# Altium PCB A3.PcbDoc
Units mm, origin at the board's own origin, x right, y up, seen from the top; angles counter-clockwise.
Board outline 84 x 79 mm, 2 copper layers (Top Layer, Bottom Layer); 18 components, 44 nets, 114 pads, 0 vias.
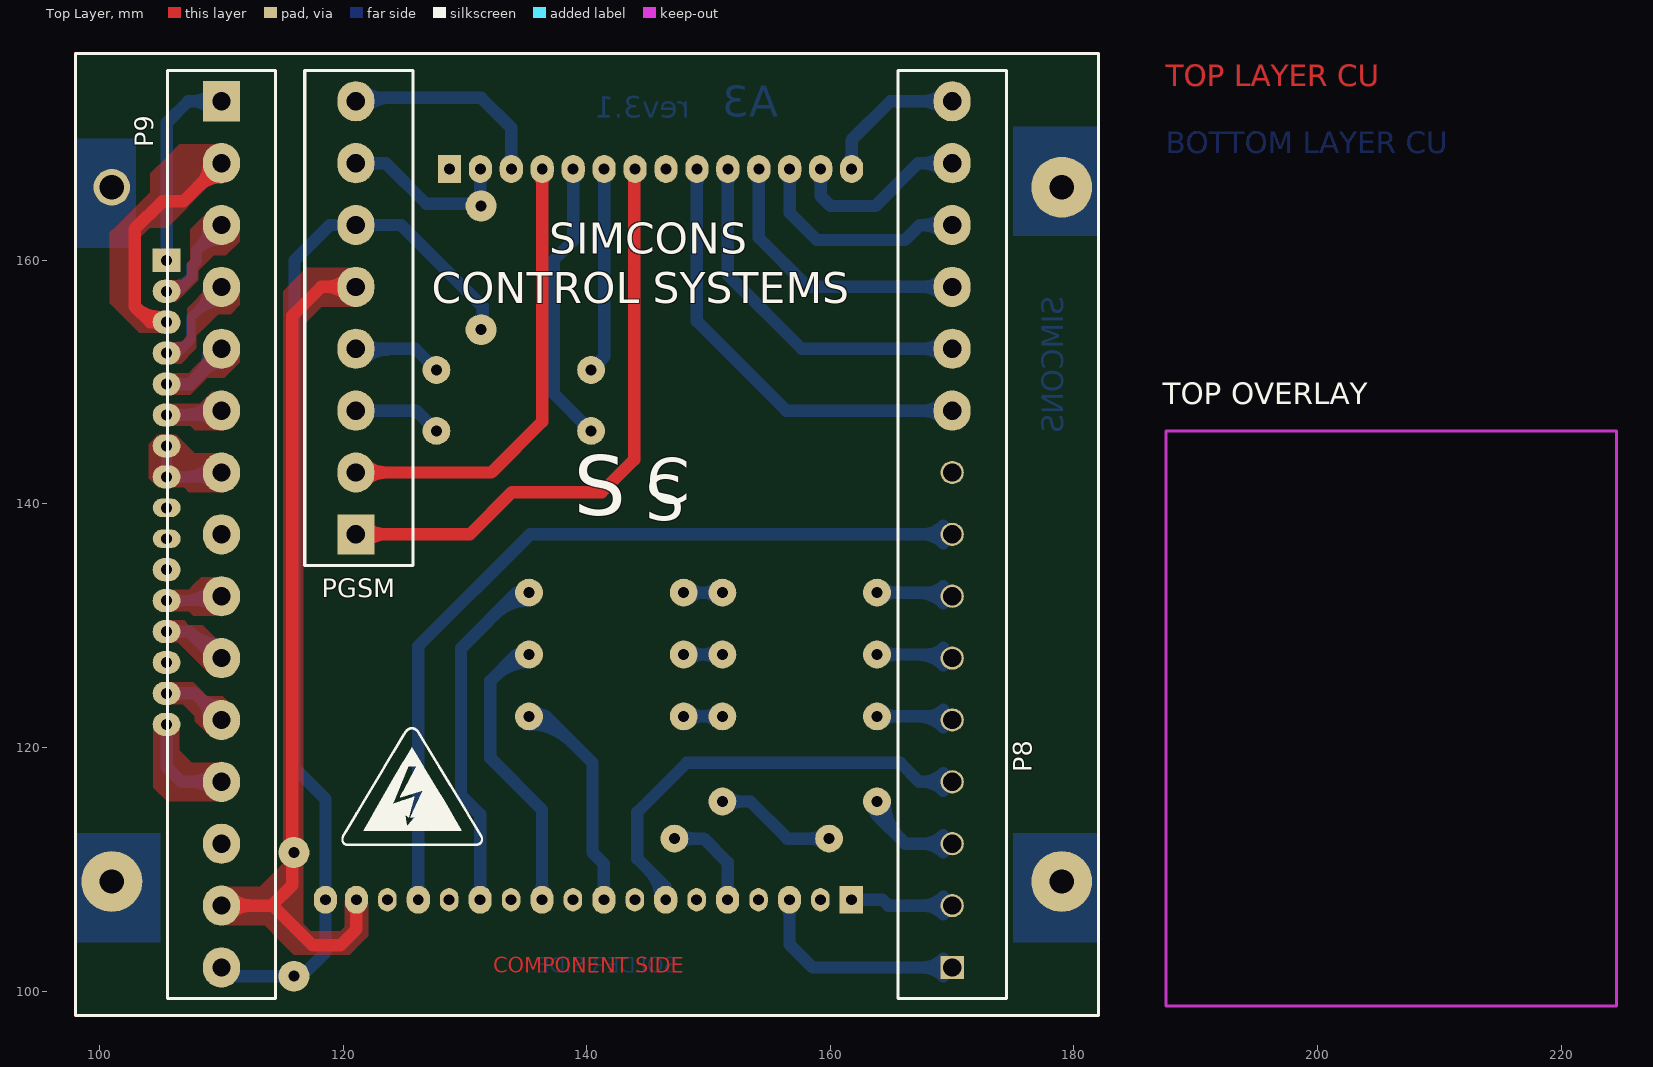
[diagram p0: Top Layer view]
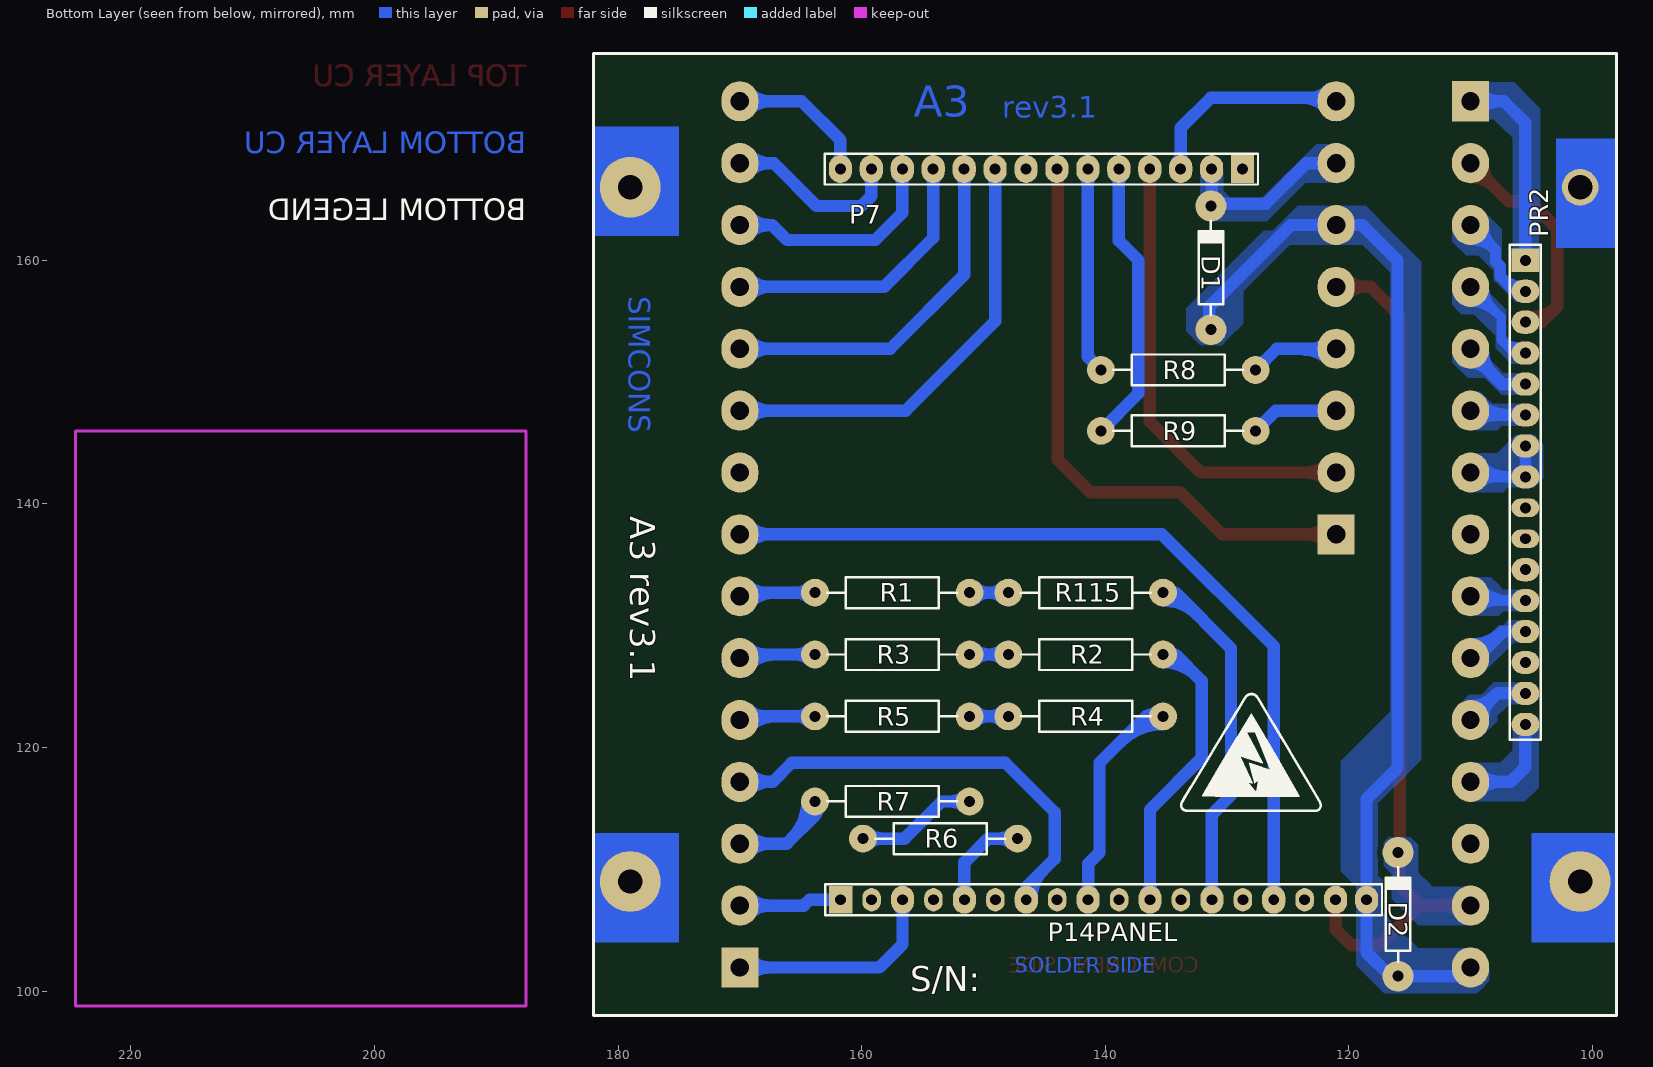
[diagram p1: Bottom Layer view, seen from below]
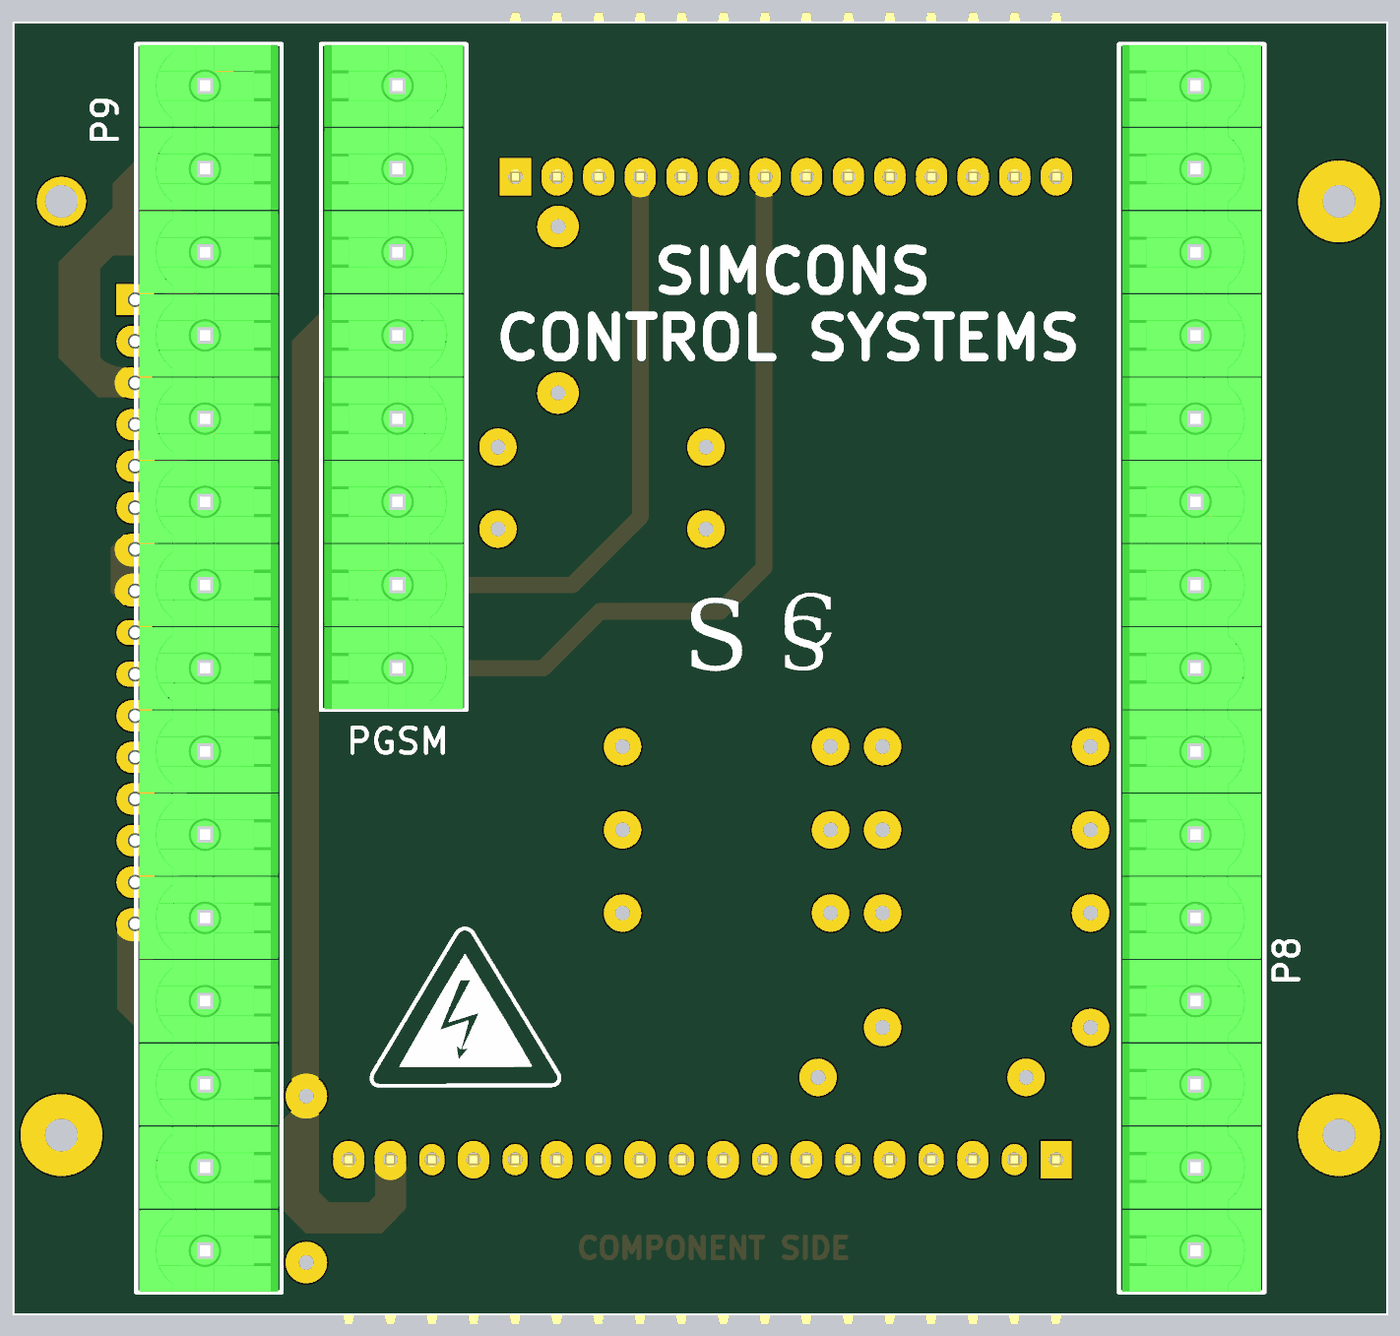
[diagram p2: 3D render of the assembled board from above, using the file's embedded part models]

## Layer stack, top to bottom
Top Solder: solder mask 0.0102, Solder Resist, Dk 3.5
Top Layer: signal copper 0.0356
Dielectric1: dielectric 0.32, FR-4, Dk 4.8
Bottom Layer: signal copper 0.0356
Bottom Solder: solder mask 0.0102, Solder Resist, Dk 3.5

## Board outline
98,98 182,98 182,177 98,177

## Design rules (kind name [scope] priority, off if disabled: settings)
Clearance AC [(InNet('R') OR InNet('Y') OR InNet('B') OR InNet('N') OR InNet('DGB') OR InNet('DGN') OR InNet('DGR') OR InNet('DGY'))] p1: gap=0.635 ignorepadtopadclearanceinfootprint=FALSE except(0: Arc-Hole Track-Hole SMDPad-Hole THPad-Hole Via-Hole Fill-Hole Poly-Hole Region-Hole Text-Hole)
Clearance [All] p2: gap=0.457 ignorepadtopadclearanceinfootprint=FALSE except(0: Arc-Hole Track-Hole SMDPad-Hole THPad-Hole Via-Hole Fill-Hole Poly-Hole Region-Hole Text-Hole)
ComponentClearance [All] p1 off: gap=0.254 collisioncheckmode=3 verticalgap=0.254 showdistances=FALSE
Height [All] p1 off: minheight=0 maxheight=25.4 prefheight=12.7
PolygonConnect [All] p1: connectstyle=Direct reliefconductorwidth=0.254 reliefentries=4 polygonreliefangle="90 Angle" airgapwidth=0.254
RoutingVias [All] p1: holewidth=0.711 width=1.524 viastyle="Through Hole" minholewidth=0.711 minwidth=1.27 maxholewidth=2 maxwidth=3.048
SilkToSolderMaskClearance SilkscreenOverComponentPads [IsPad] p1: minsilkscreentomaskgap=0.254 clearancetoexposedcopper=TRUE
SolderMaskExpansion [All] p1: expansion=0.102
Width [All] p1: maxlimit=1.27 minlimit=0.61 preferedwidth=0.762
27 further rules are at their usual default settings.

## Components (designator, comment, footprint, x,y, rotation, side; value= is the part's Value field where it differs from the comment)
D1 "P6KE6V8A" DIODE1A 131.318,159.385 r90 bottom
D2 "P6KE44CA" DIODE1A 115.951,106.299 r90 bottom
P7 "Header 14" HDR1X14_BURGE_M 128.72,167.5 r0 bottom locked
P8 "XY2500 7PIN+8PIN MALE ST, FEMALE R/A" XY2500_15PIN_M_ST#1 170,137.5 r90 top locked
P9 "XY2500 7PIN+8PIN MALE ST, FEMALE R/A" XY2500_15PIN_M_ST#2 110,137.5 r270 top locked
P14PANEL "Header 18" HDR1X18_BURGE_M 161.72,107.5 r180 bottom locked
PGSM "XY2500 8PIN MALE ST, FEMALE R/A" XY2500_8PIN_M_ST 121.285,155.28 r90 top locked
PR2 "Header 16" HDR1X16_BURGE_F 105.5,160 r270 bottom
R1 "MFR 1M .5W" AXIAL-0.5 157.48,132.715 r0 bottom
R2 "MFR 1M .5W" AXIAL-0.5 141.605,127.635 r0 bottom
R3 "MFR 1M .5W" AXIAL-0.5 157.48,127.635 r0 bottom
R4 "MFR 1M .5W" AXIAL-0.5 141.605,122.555 r0 bottom
R5 "MFR 1M .5W" AXIAL-0.5 157.48,122.555 r0 bottom
R6 "MFR 1M .5W" AXIAL-0.5 153.543,112.522 r0 bottom
R7 "MFR 1M .5W" AXIAL-0.5 157.48,115.57 r0 bottom
R8 "MFR 1M .5W" AXIAL-0.5 134,151 r180 bottom
R9 "MFR 1M .5W" AXIAL-0.5 134,146 r180 bottom
R115 "MFR 1M .5W" AXIAL-0.5 141.605,132.715 r0 bottom

## Footprints (in the part's own frame and the unit in brackets; to place one, negate y for a bottom-side part, rotate by r counter-clockwise, add the part's x,y. Pads: shape width x height; smd on the part's side, far side on the other; paste and mask are expansions set on the pad)
AXIAL-0.5 [mil] "Axial Device, Thru-Hole; 2 Leads; 0.5 in Pin Spacing"
  round 90 hole 35.43: 1(-250,0) 2(250,0)
  silkscreen extent -210,-50 210,50, body extent -270,-51 270,51, height 106
DIODE1A [mm] "DIODE 1 AMPERE"
  round 2.54 hole 0.9: 1(-5.08,0) 2(5.08,0)
  silkscreen extent -3.87,-1.02 3.87,1.02, body extent -5.48,-1 5.48,1, height 2.09
HDR1X14_BURGE_M [mm] "Connector; Header; 14 Position"
  rect 1.905x2.286 hole 0.9: 1(0,0)
  oval 1.905x2.286 hole 0.9: 2(2.54,0) 3(5.08,0) 4(7.62,0) 5(10.16,0) 6(12.7,0) 7(15.24,0) 8(17.78,0) 9(20.32,0) 10(22.86,0) 11(25.4,0) 12(27.94,0) 13(30.48,0) 14(33.02,0)
  silkscreen extent -1.27,-1.27 34.29,1.27, body extent -1.27,-10.04 34.29,0.32, height 2.56
HDR1X16_BURGE_F [mil] "Connector; Header; 16 Position"
  rect 75x90 hole 35.43: 1(0,0)
  oval 75x90 hole 35.43: 2(100,0) 3(200,0) 4(300,0) 5(400,0) 6(500,0) 7(600,0) 8(700,0) 11(1000,0) 12(1100,0) 13(1200,0) 14(1300,0) 15(1400,0) 16(1500,0)
  oval 60x90 hole 35.43: 9(800,0) 10(900,0)
  silkscreen extent -50,-50 1550,50, body extent -50,-50 1550,50, height 237
HDR1X18_BURGE_M [mm] "Connector; Header; 18 Position"
  rect 1.905x2.286 hole 0.9: 1(0,0)
  oval 1.524x1.905 hole 0.9: 2(2.54,0) 4(7.62,0) 6(12.7,0) 8(17.78,0) 10(22.86,0) 12(27.94,0) 14(33.02,0) 16(38.1,0)
  oval 1.905x2.286 hole 0.9: 3(5.08,0) 5(10.16,0) 7(15.24,0) 9(20.32,0) 11(25.4,0) 13(30.48,0) 15(35.56,0) 17(40.64,0) 18(43.18,0)
  silkscreen extent -1.27,-1.27 44.45,1.27, body extent -1.27,-10.04 44.45,0.32, height 2.54
XY2500_8PIN_M_ST [mm]
  rect 3.302x3.048 hole 1.5: 1(-17.78,0.25)
  oval 3.302x3.048 hole 1.5: 2(-12.7,0.25) 3(-7.62,0.25) 4(-2.54,0.25) 5(2.54,0.25) 6(7.62,0.25) 7(12.7,0.25) 8(17.78,0.25)
  silkscreen extent -20.32,-4.45 20.32,4.45, body extent -20.28,-4.24 20.28,4.24, height 12
XY2500_15PIN_M_ST#1 [mm]
  rect 1.905x1.905 / inner rect 3.302x3.048 / far side rect 3.302x3.048 hole 1.5: 1(-35.56,0)
  round 1.905 / inner oval 3.302x3.048 / far side oval 3.302x3.048 hole 1.5: 2(-30.48,0) 3(-25.4,0) 4(-20.32,0) 5(-15.24,0) 6(-10.16,0) 7(-5.08,0) 8(0,0) 9(5.08,0)
  oval 3.302x3.048 hole 1.5: 10(10.16,0) 11(15.24,0) 12(20.32,0) 13(25.4,0) 14(30.48,0) 15(35.56,0)
  silkscreen extent -38.1,-4.45 38.1,4.45, body extent -38.06,-4.24 38.06,4.24, height 12.08
XY2500_15PIN_M_ST#2 [mm]
  rect 3.302x3.048 hole 1.5: 1(-35.56,0)
  oval 3.302x3.048 hole 1.5: 2(-30.48,0) 3(-25.4,0) 4(-20.32,0) 5(-15.24,0) 6(-10.16,0) 7(-5.08,0) 8(0,0) 9(5.08,0) 10(10.16,0) 11(15.24,0) 12(20.32,0) 13(25.4,0) 14(30.48,0) 15(35.56,0)
  silkscreen extent -38.1,-4.45 38.1,4.45, body extent -38.06,-4.24 38.06,4.24, height 12.08

## Part data
D1 D2: library part "Diode 1N5408", "3 Amp Medium Power Silicon Rectifier Diode"
P7: "Header, 14-Pin"
P8 P9: library part "Header 15", "Header, 15-Pin"
P14PANEL: "Header, 18-Pin"
PGSM: library part "Header 8", "Header, 8-Pin"
PR2: "Header, 16-Pin"
R1 R2 R3 R4 R5 R6 R7 R8 R9 R115: library part "Res Semi", "Semiconductor Resistor"

## Free pads (board coordinates)
  round 5 hole 2: 0(101,109) 1(179,109) 2(179,166)
  round 3 hole 2: 3(101,166)

## Nets (pads, with @x,y where several pads share a name; then routed paths per layer and width w, separated by ;. In a path a pad name is that pad's centre, name@x,y a point inside that pad or via, vN(x,y) a via of type N, cw(c..) or ccw(c..) an arc to the next point about the centre after c; other vN are vias at no path point)
B: P8.5 R5.2 | length 12.6
  Bottom Layer w1.016: R5.2 169.705,122.555 P8.5 ; R5.2@164.279,122.106 cw(c165.363,121.022) 165.363,122.555 cw(c165.363,124.088) R5.2@164.279,123.004 ; 167.142,122.555 cw(c167.142,119.529) P8.5@169.282,121.669 ; 167.953,122.555 ccw(c167.953,124.434) P8.5@169.282,123.105
B_M: P14PANEL.9 R4.1 | length 28
  Bottom Layer w1.016: R4.1@135.255,121.92 cw(c135.255,117.014) 138.724,120.483 ; R4.1 136.652,122.555 ; R4.1@135.255,122.936 cw(c135.255,120.483) 136.989,122.218 ; R4.1@135.733,122.137 cw(c136.652,121.336) 136.652,122.555 ; R4.1@135.733,122.973 ccw(c136.652,123.774) 136.652,122.555 ; P14PANEL.9@141.086,108.005 ccw(c140.327,108.764) 141.4,108.764 ccw(c142.473,108.764) P14PANEL.9@141.714,108.005 ; P14PANEL.9 141.4,110.441 140.462,111.379 140.462,118.745 136.652,122.555
BAT+: D2.2 P9.14 P14PANEL.17 PGSM.5 | length 80.1
  Top Layer w1.016: P9.14 114.132,107.02 ; P9.14@110.722,106.305 cw(c112.436,104.608) 112.436,107.02 cw(c112.436,109.432) P9.14@110.722,107.735 ; PGSM.5@120.317,157.102 ccw(c118.582,155.367) 118.582,157.82 ccw(c118.582,160.273) PGSM.5@120.317,158.538 ; P14PANEL.17@120.766,106.995 cw(c120.007,106.236) 121.08,106.236 cw(c122.153,106.236) P14PANEL.17@121.394,106.995 ; PGSM.5 118.196,157.82 115.824,155.448 115.824,108.712 114.132,107.02 ; P14PANEL.17 121.08,105.078 119.761,103.759 117.475,103.759 114.214,107.02 114.132,107.02
BTS+: PGSM.3 R9.2 | length 7.6
  Bottom Layer w1.016: PGSM.3@121.248,147.447 PGSM.3 125.99,147.66 R9.2
BTS+_R: P7.5 R9.1 | length 25.1
  Bottom Layer w1.016: P7.5@138.566,166.995 cw(c137.807,166.236) 138.88,166.236 cw(c139.953,166.236) P7.5@139.194,166.995 ; P7.5 138.88,161.613 137.287,160.02 137.287,149.063 R9.1
BTS-: PGSM.4 R8.2 | length 11.3
  Bottom Layer w1.016: PGSM.4@121.121,152.654 PGSM.4 125.91,152.74 R8.2 ; PGSM.4@121.753,151.895 cw(c123.587,150.061) 123.587,152.654 ; PGSM.4@121.753,153.331 ccw(c123.389,154.967) 123.389,152.654
BTS-_R: P7.6 R8.1 | length 18.6
  Bottom Layer w1.016: R8.1 141.42,152.07 P7.6 ; P7.6@141.106,166.995 cw(c140.347,166.236) 141.42,166.236 cw(c142.493,166.236) P7.6@141.734,166.995
BUZZEROUT: P9.6 PR2.6 | length 10.2
  Bottom Layer w1.016: PR2.6 109.64,147.3 P9.6 ; PR2.6@106.005,146.986 cw(c106.764,146.227) 106.764,147.3 cw(c106.764,148.373) PR2.6@106.005,147.614 ; 106.985,147.3 ccw(c106.985,150.548) P9.6@109.282,148.251 ; 108.11,147.3 cw(c108.11,145.643) P9.6@109.282,146.815
CONT_S_IN: P7.7 PGSM.1 | length 53.1
  Top Layer w1.016: PGSM.1 130.388,137.5 133.858,140.97 141.224,140.97 143.891,143.637 143.891,167.431 P7.7 ; PGSM.1@121.753,136.782 cw(c123.488,135.047) 123.488,137.5 cw(c123.488,139.953) PGSM.1@121.753,138.218
CRANKOUT: P9.2 PR2.3 | length 27.1
  Top Layer w1.016: PR2.3@104.995,154.606 ccw(c104.236,153.847) 104.236,154.92 ccw(c104.236,155.993) PR2.3@104.995,155.234 ; PR2.3@105.263,155.362 cw(c104.956,158.296) 102.87,156.21 ; PR2.3 104.16,154.92 102.87,156.21 ; 108.049,166.029 cw(c110,164.078) P9.2@110,166.837 ; 108.355,166.335 ccw(c106.838,167.853) P9.2@108.984,167.853 ; P9.2 106.866,164.846 105.156,164.846 102.87,162.56 102.87,156.21
DGB: P8.1 P14PANEL.3 | length 23.3
  Bottom Layer w1.016: P14PANEL.3@156.326,106.995 cw(c155.567,106.236) 156.64,106.236 cw(c157.713,106.236) P14PANEL.3@156.954,106.995 ; P14PANEL.3 156.64,103.837 158.537,101.94 P8.1 ; P8.1@169.282,101.222 ccw(c167.547,99.487) 167.547,101.94 ccw(c167.547,104.393) P8.1@169.282,102.658
DGN: P8.4 P14PANEL.7 | length 42.6
  Bottom Layer w1.016: 145.123,109.893 cw(c142.921,107.691) P14PANEL.7@146.035,107.691 ; P14PANEL.7 146.48,108.536 144.145,110.871 144.145,114.681 148.209,118.745 165.735,118.745 167.3,117.18 P8.4 ; P8.4@169.282,116.462 ccw(c167.547,114.727) 167.547,117.18 ccw(c167.547,119.633) P8.4@169.282,117.898
DGR: P8.3 R7.2 | length 16.9
  Bottom Layer w1.016: R7.2@163.449,115.57 ccw(c165.289,115.57) 163.988,114.269 ; R7.2 163.83,114.427 166.157,112.1 P8.3 ; R7.2@164.465,115.57 ccw(c168.757,115.57) 165.722,112.535 ; P8.3@169.282,111.382 ccw(c167.547,109.647) 167.547,112.1 ccw(c167.547,114.553) P8.3@169.282,112.818
DGR_M: P14PANEL.5 R6.1 | length 12.3
  Bottom Layer w1.016: R6.1 149.606,112.522 151.56,110.568 P14PANEL.5 ; R6.1@147.642,112.073 cw(c148.726,110.989) 148.726,112.522 cw(c148.726,114.055) R6.1@147.642,112.971 ; P14PANEL.5@151.246,108.005 ccw(c150.487,108.764) 151.56,108.764 ccw(c152.633,108.764) P14PANEL.5@151.874,108.005
DGSTOPOUT: P9.3 PR2.2 | length 13.1
  Bottom Layer w0.914: PR2.2 105.774,157.734 106.623,157.734 107.557,158.669 107.557,159.517 107.95,159.91 107.95,160.85 P9.3 ; PR2.2@106.182,157.396 cw(c107.022,157.286) 107.022,158.133 ; 107.962,160.862 cw(c110,158.824) P9.3@110,161.706 ; 108.269,161.169 ccw(c106.664,162.773) P9.3@108.933,162.773
DGY: P8.2 P14PANEL.1 | length 14
  Bottom Layer w1.016: P14PANEL.1 164.28,107.5 164.76,107.02 P8.2 ; P14PANEL.1@162.034,107.186 cw(c162.793,106.427) 162.793,107.5 cw(c162.793,108.573) P14PANEL.1@162.034,107.814 ; P8.2@169.282,106.302 ccw(c167.547,104.567) 167.547,107.02 ccw(c167.547,109.473) P8.2@169.282,107.738
DIGITALIN: P9.7 PR2.7 PR2.8 | length 16.9
  Bottom Layer w0.914: PR2.8@105.15,142.57 ccw(c104.304,143.416) 105.5,143.416 ccw(c106.696,143.416) PR2.8@105.85,142.57 ; PR2.7@105.15,144.41 cw(c104.304,143.564) 105.5,143.564 cw(c106.696,143.564) PR2.7@105.85,144.41 ; PR2.7 PR2.8 109.64,142.22 P9.7 ; PR2.8@106.041,141.87 cw(c106.886,141.024) 106.886,142.22 cw(c106.886,143.416) PR2.8@106.041,142.57 ; 106.862,142.22 ccw(c106.862,145.591) P9.7@109.246,143.207 ; 107.987,142.22 cw(c107.987,140.44) P9.7@109.246,141.699
EMSTP: P7.11 P8.12 | length 28.7
  Bottom Layer w1.016: P7.11@153.806,166.995 cw(c153.047,166.236) 154.12,166.236 cw(c155.193,166.236) P7.11@154.434,166.995 ; P7.11 154.12,161.856 158.156,157.82 P8.12 ; P8.12@169.282,157.102 ccw(c167.547,155.367) 167.547,157.82 ccw(c167.547,160.273) P8.12@169.282,158.538
FLGIN: P7.4 PGSM.2 | length 43.3
  Top Layer w1.016: PGSM.2 132.166,142.58 136.34,146.754 P7.4 ; PGSM.2@121.753,141.862 cw(c123.488,140.127) 123.488,142.58 cw(c123.488,145.033) PGSM.2@121.753,143.298 ; P7.4@136.026,166.995 cw(c135.267,166.236) 136.34,166.236 cw(c137.413,166.236) P7.4@136.654,166.995
FLIN: P7.8 | length 0.3
  Bottom Layer w1.016: P7.8@146.304,167.304 P7.8
FLSTARTOUT: P9.4 PR2.4 | length 14
  Bottom Layer w0.762: PR2.4 106.406,152.38 107.481,153.455 ; PR2.4@105.8,152.941 ccw(c106.157,154.779) 107.481,153.455 ; 107.832,155.652 cw(c110,153.484) P9.4@110,156.55 ; 108.139,155.959 ccw(c106.404,157.693) P9.4@108.857,157.693 ; P9.4 107.481,155.301 107.481,153.455
GCONTACTIN: P9.10 PR2.13 | length 10
  Bottom Layer w1.016: PR2.13 107.335,129.52 ; PR2.13@106.005,129.206 cw(c106.764,128.447) 106.764,129.52 cw(c106.764,130.593) PR2.13@106.005,129.834 ; P9.10@109.965,128.482 cw(c109.845,132.029) 107.335,129.52 ; P9.10 109.515,127.34 107.335,129.52
GCONTACTOUT: P9.9 PR2.12 | length 10.6
  Bottom Layer w0.914: PR2.12 109.64,132.06 P9.9 ; PR2.12@106.041,131.71 cw(c106.886,130.864) 106.886,132.06 cw(c106.886,133.256) PR2.12@106.041,132.41 ; 106.862,132.06 ccw(c106.862,135.431) P9.9@109.246,133.047 ; 107.987,132.06 cw(c107.987,130.28) P9.9@109.246,131.539
GND: D1.1 D2.1 P9.15 P14PANEL.18 PGSM.6 | length 88.8
  Bottom Layer w1.016: P9.15 110.721,101.219 D2.1 116.586,101.219 118.54,103.173 118.54,115.775 116,118.315 116,160 118.9,162.9 PGSM.6 124.755,162.9 131.445,156.21 D1.1@131.445,154.305
LLOP: P7.12 P8.13 | length 23.9
  Bottom Layer w1.016: P7.12@156.346,166.995 cw(c155.587,166.236) 156.66,166.236 cw(c157.733,166.236) P7.12@156.974,166.995 ; P7.12 156.66,163.888 158.877,161.671 166.116,161.671 167.345,162.9 P8.13 ; P8.13@169.282,162.182 ccw(c167.547,160.447) 167.547,162.9 ccw(c167.547,165.353) P8.13@169.282,163.618
LOPIN: P7.9 P8.10 | length 42
  Bottom Layer w1.016: P7.9@148.726,166.995 cw(c147.967,166.236) 149.04,166.236 cw(c150.113,166.236) P7.9@149.354,166.995 ; P7.9 149.04,154.998 156.378,147.66 P8.10 ; P8.10@169.282,146.942 ccw(c167.547,145.207) 167.547,147.66 ccw(c167.547,150.113) P8.10@169.282,148.378
MANUALOUT: P9.1 PR2.1 | length 22.1
  Bottom Layer w1.016: PR2.1@105.186,160.314 ccw(c104.427,161.073) 105.5,161.073 ccw(c106.573,161.073) PR2.1@105.814,160.314 ; PR2.1 105.5,171.286 107.274,173.06 P9.1 ; P9.1@109.282,172.342 ccw(c107.547,170.607) 107.547,173.06 ccw(c107.547,175.513) P9.1@109.282,173.778
MCONTACTIN: P9.12 PR2.16 | length 14
  Bottom Layer w1.016: PR2.16@105.186,121.586 cw(c104.427,120.827) 105.5,120.827 cw(c106.573,120.827) PR2.16@105.814,121.586 ; PR2.16 105.5,118.401 106.721,117.18 P9.12 ; P9.12@109.282,116.462 ccw(c107.547,114.727) 107.547,117.18 ccw(c107.547,119.633) P9.12@109.282,117.898
MCONTACTOUT: P9.11 PR2.15 | length 10.9
  Bottom Layer w1.016: PR2.15 107.82,124.44 P9.11 ; PR2.15@106.005,124.126 cw(c106.764,123.367) 106.764,124.44 cw(c106.764,125.513) PR2.15@106.005,124.754 ; 108.049,124.211 ccw(c110,126.162) P9.11@110,123.403 ; 108.355,123.905 cw(c106.838,122.387) P9.11@108.984,122.387
N: P8.8 P14PANEL.15 | length 74
  Bottom Layer w1.016: P14PANEL.15@125.846,108.005 ccw(c125.087,108.764) 126.16,108.764 ccw(c127.233,108.764) P14PANEL.15@126.474,108.005 ; P14PANEL.15 126.16,128.319 135.341,137.5 P8.8 ; P8.8@169.282,136.782 ccw(c167.547,135.047) 167.547,137.5 ccw(c167.547,139.953) P8.8@169.282,138.218
NetR1_1: R1.1 R115.2 | length 8
  Bottom Layer w1.016: R115.2 R1.1 ; R115.2@148.404,132.266 cw(c149.488,131.182) 149.488,132.715 cw(c149.488,134.248) R115.2@148.404,133.164 ; R1.1@150.681,132.266 ccw(c149.597,131.182) 149.597,132.715 ccw(c149.597,134.248) R1.1@150.681,133.164
NetR2_2: R2.2 R3.1 | length 8
  Bottom Layer w1.016: R2.2 R3.1 ; R2.2@148.404,127.186 cw(c149.488,126.102) 149.488,127.635 cw(c149.488,129.168) R2.2@148.404,128.084 ; R3.1@150.681,127.186 ccw(c149.597,126.102) 149.597,127.635 ccw(c149.597,129.168) R3.1@150.681,128.084
NetR4_2: R4.2 R5.1 | length 8
  Bottom Layer w1.016: R4.2 R5.1 ; R4.2@148.404,122.106 cw(c149.488,121.022) 149.488,122.555 cw(c149.488,124.088) R4.2@148.404,123.004 ; R5.1@150.681,122.106 ccw(c149.597,121.022) 149.597,122.555 ccw(c149.597,124.088) R5.1@150.681,123.004
NetR6_2: R6.2 R7.1 | length 14.8
  Bottom Layer w1.016: R7.1 153.416,115.57 156.464,112.522 R6.2 ; R7.1@151.579,115.121 cw(c152.663,114.037) 152.663,115.57 cw(c152.663,117.103) R7.1@151.579,116.019 ; R6.2@159.444,112.073 ccw(c158.36,110.989) 158.36,112.522 ccw(c158.36,114.055) R6.2@159.444,112.971
OILTEMP: P7.14 P8.15 | length 17.5
  Bottom Layer w1.016: P7.14@161.426,168.005 ccw(c160.667,168.764) 161.74,168.764 ccw(c162.813,168.764) P7.14@162.054,168.005 ; P7.14 161.74,169.868 164.932,173.06 P8.15 ; P8.15@169.282,172.342 ccw(c167.547,170.607) 167.547,173.06 ccw(c167.547,175.513) P8.15@169.282,173.778
PREHEATEROUT: P9.5 PR2.5 | length 11.4
  Bottom Layer w1.016: PR2.5 107.422,149.84 110,152.418 P9.5 ; PR2.5@106.005,149.526 cw(c106.764,148.767) 106.764,149.84 cw(c106.764,150.913) PR2.5@106.005,150.154 ; 108.128,150.546 ccw(c106.06,152.613) P9.5@108.984,152.613 ; 108.598,151.016 cw(c110,149.615) P9.5@110,151.597
R: P8.7 R1.2 | length 12.6
  Bottom Layer w1.016: R1.2 169.705,132.715 P8.7 ; R1.2@164.279,132.266 cw(c165.363,131.182) 165.363,132.715 cw(c165.363,134.248) R1.2@164.279,133.164 ; 167.142,132.715 cw(c167.142,129.689) P8.7@169.282,131.829 ; 167.953,132.715 ccw(c167.953,134.594) P8.7@169.282,133.265
R1IN: P7.3 PGSM.8 | length 22.8
  Bottom Layer w1.016: PGSM.8 121.33,173.355 131.318,173.355 133.8,170.873 P7.3 ; PGSM.8@121.753,172.469 cw(c123.893,170.329) 123.893,173.355 ; PGSM.8@121.753,173.905 ccw(c123.082,175.234) 123.082,173.355 ; P7.3@133.486,168.005 ccw(c132.727,168.764) 133.8,168.764 ccw(c134.873,168.764) P7.3@134.114,168.005
R_M: P14PANEL.13 R115.1 | length 33.6
  Bottom Layer w1.016: P14PANEL.13@130.926,108.005 ccw(c130.167,108.764) 131.24,108.764 ccw(c132.313,108.764) P14PANEL.13@131.554,108.005 ; P14PANEL.13 131.24,114.505 129.667,116.078 129.667,128.143 134.239,132.715 R115.1 ; 132.437,130.913 cw(c135.255,128.094) R115.1@135.255,132.08
TIOUT: D1.2 P7.2 PGSM.7 | length 14.9
  Bottom Layer w1.016: PGSM.7 123.485,167.98 126.815,164.65 131.133,164.65 D1.2 ; P7.2 131.26,164.65 D1.2@131.445,164.465
WATERTEMP: P7.13 P8.14 | length 20.3
  Bottom Layer w1.016: P7.13@158.886,166.995 cw(c158.127,166.236) 159.2,166.236 cw(c160.273,166.236) P7.13@159.514,166.995 ; P7.13 159.2,165.285 160.02,164.465 163.703,164.465 167.218,167.98 P8.14 ; P8.14@169.282,167.262 ccw(c167.547,165.527) 167.547,167.98 ccw(c167.547,170.433) P8.14@169.282,168.698
WTANIN: P7.10 P8.11 | length 35.2
  Bottom Layer w1.016: P7.10@151.266,166.995 cw(c150.507,166.236) 151.58,166.236 cw(c152.653,166.236) P7.10@151.894,166.995 ; P7.10 151.58,158.808 157.648,152.74 P8.11 ; P8.11@169.282,152.022 ccw(c167.547,150.287) 167.547,152.74 ccw(c167.547,155.193) P8.11@169.282,153.458
Y: P8.6 R3.2 | length 12.6
  Bottom Layer w1.016: R3.2 169.705,127.635 P8.6 ; R3.2@164.279,127.186 cw(c165.363,126.102) 165.363,127.635 cw(c165.363,129.168) R3.2@164.279,128.084 ; 167.142,127.635 cw(c167.142,124.609) P8.6@169.282,126.749 ; 167.953,127.635 ccw(c167.953,129.514) P8.6@169.282,128.185
Y_M: P14PANEL.11 R2.1 | length 28.6
  Bottom Layer w1.016: 132.437,125.833 cw(c135.255,123.014) R2.1@135.255,127 ; R2.1 134.239,127.635 132.08,125.476 132.08,119.126 136.32,114.886 P14PANEL.11 ; P14PANEL.11@136.006,108.005 ccw(c135.247,108.764) 136.32,108.764 ccw(c137.393,108.764) P14PANEL.11@136.634,108.005
pads on no net: P7.1 P8.9 P9.8 P9.13 P14PANEL.2 P14PANEL.4 P14PANEL.6 P14PANEL.8 P14PANEL.10 P14PANEL.12 P14PANEL.14 P14PANEL.16 PR2.9 PR2.10 PR2.11 PR2.14
copper on no net: | length 652
  Top Layer w0.203: 98,98 98,177 182,177 182,98 98,98
  Bottom Layer w0.203: 98,98 98,177 182,177 182,98 98,98

## Polygon pours and split planes (outlines as drawn)
TIOUT on Bottom Layer "Top Layer-No Net" (solid, pour order 43): 121.158,166.37 123.571,166.37 124.841,165.1 126.746,163.195 127.762,163.195 131.318,163.195 132.588,164.465 132.207,164.846 132.207,167.513 130.302,167.513 130.302,165.735 129.794,165.227 129.667,165.1 127.127,165.1 122.682,169.545 120.904,169.545
BAT+ on Bottom Layer "Top Layer-No Net" (solid, pour order 40): 109.982,105.41 114.3,105.41 115.951,107.061 116.459,107.569 116.459,109.093 116.459,109.601 116.967,110.109 117.221,110.363 117.221,111.252 117.221,112.141 116.713,112.649 114.935,112.649 114.3,112.014 114.3,110.871 114.3,109.728 113.411,108.839 113.157,108.585 109.982,108.585
GND on Bottom Layer "Top Layer-No Net" (solid, pour order 37): 119.38,108.077 119.38,108.585 120.269,109.474 120.65,109.855 120.65,111.633 120.65,118.872 119.38,120.142 118.11,118.872 118.11,117.856 118.11,108.077 118.237,107.95
GND on Bottom Layer "Top Layer-No Net" (solid, pour order 34): 108.458,101.854 108.458,100.838 109.22,100.076 109.474,99.822 117.094,99.822 119.253,101.981 119.38,102.108 119.38,103.251 119.38,109.601 118.999,109.982 118.872,109.855 117.729,109.855 117.729,109.601 117.221,109.093 117.221,107.569 117.221,106.426 116.205,105.41 114.3,103.505 109.982,103.505
GND on Bottom Layer "Top Layer-No Net" (solid, pour order 30): 109.982,100.33 117.348,100.33 118.491,101.473 119.38,102.362 119.38,107.569 119.38,120.142 117.729,121.793 116.586,122.936 116.586,142.621 116.586,159.004 118.237,160.655 118.872,161.29 123.444,161.29 124.841,161.29 127.889,158.242 128.651,157.48 128.651,155.829 128.651,154.813 129.921,153.543 130.429,153.035 132.08,153.035 132.207,153.035 132.969,153.797 133.35,154.178 133.35,156.083 127,162.433 126.238,162.433 125.476,163.195 124.206,164.465 121.158,164.465 118.618,164.465 116.459,162.306 114.935,160.782 114.046,159.893 114.046,156.21 114.046,118.999 117.475,115.57 117.602,115.443 117.602,107.188 117.602,105.156 116.205,103.759 115.951,103.505 109.982,103.505
GCONTACTOUT on Bottom Layer "Top Layer-No Net" (solid, remove dead copper, pour order 29): 105.537,132.969 107.315,132.969 107.696,133.35 108.331,133.985 109.982,133.985 109.982,130.81 107.696,130.81 107.315,131.191 105.537,131.191
GCONTACTIN on Bottom Layer "Top Layer-No Net" (solid, remove dead copper, pour order 31): 108.966,126.111 106.426,128.651 105.41,128.651 105.41,130.429 106.934,130.429 107.188,130.175 107.315,130.048 107.696,130.048 108.839,128.905 110.109,128.905
MCONTACTOUT on Bottom Layer "Top Layer-No Net" (solid, remove dead copper, pour order 32): 105.537,123.571 107.315,123.571 107.823,123.063 107.823,122.174 108.966,121.031 111.125,123.19 111.125,123.317 110.109,124.333 109.347,124.333 109.093,124.333 108.204,125.222 108.077,125.349 105.41,125.349
MCONTACTOUT on Bottom Layer "Top Layer-No Net" (solid, remove dead copper, pour order 33): 106.172,123.571 106.807,123.571 108.077,122.301 108.712,122.936 108.712,123.952 107.823,124.841 107.696,124.968 105.918,124.968
MCONTACTIN on Bottom Layer "Top Layer-No Net" (solid, remove dead copper, pour order 35): 106.553,121.92 106.553,119.761 107.442,118.872 107.569,118.745 109.982,118.745 109.982,115.57 105.537,115.57 104.394,116.713 104.394,121.92
DIGITALIN on Bottom Layer "Top Layer-No Net" (solid, remove dead copper, pour order 36): 110.109,144.145 107.823,144.145 107.315,144.653 106.299,145.669 105.41,145.669 104.775,145.669 104.267,145.161 104.013,144.907 104.013,142.748 104.013,142.113 104.775,141.351 106.934,141.351 107.315,140.97 110.109,140.97
BUZZEROUT on Bottom Layer "Top Layer-No Net" (solid, remove dead copper, pour order 38): 105.537,146.431 107.442,146.431 107.823,146.05 110.109,146.05 110.109,149.098 109.982,149.225 109.22,149.225 108.585,148.59 108.204,148.209 105.537,148.209
FLSTARTOUT on Bottom Layer "Top Layer-No Net" (solid, remove dead copper, pour order 42): 105.41,151.511 106.68,151.511 107.315,152.146 107.95,152.781 107.95,153.416 107.95,153.797 108.839,154.686 109.728,155.575 110.744,155.575 111.506,156.337 111.506,157.988 108.585,157.988 108.585,157.48 107.315,156.21 107.061,155.956 107.061,154.559 107.061,153.797 106.68,153.416 106.553,153.289 105.41,153.289
DGSTOPOUT on Bottom Layer "Top Layer-No Net" (solid, remove dead copper, pour order 44): 105.537,156.591 106.299,156.591 107.696,157.988 108.077,158.369 108.077,158.75 108.077,159.131 108.585,159.639 109.347,160.401 109.982,160.401 110.363,160.401 111.252,161.29 111.506,161.544 111.506,162.941 109.982,164.465 109.601,164.465 108.966,163.83 108.839,163.957 107.442,162.56 107.442,161.036 107.442,160.02 107.061,159.639 107.061,159.004 107.061,158.877 106.807,158.623 106.553,158.369 105.537,158.369
MANUALOUT on Bottom Layer "Top Layer-No Net" (solid, remove dead copper, pour order 45): 106.553,160.147 106.553,170.053 107.442,170.942 108.077,171.577 109.982,171.577 109.982,174.625 106.426,174.625 105.283,173.482 104.267,172.466 104.267,162.306 104.394,162.179 104.394,159.131
PREHEATEROUT on Bottom Layer "Top Layer-No Net" (solid, remove dead copper, pour order 41): 105.537,148.971 107.442,148.971 108.077,149.606 108.839,150.368 110.236,150.368 111.506,151.638 111.506,152.908 108.585,152.908 108.585,152.019 107.823,151.257 107.315,150.749 105.537,150.749
CRANKOUT on Top Layer "Top Layer-No Net" (solid, remove dead copper, pour order 46): 109.982,169.545 106.553,169.545 105.41,168.402 104.14,167.132 104.14,165.608 101.346,162.814 100.838,162.306 100.838,157.734 100.838,156.464 103.251,154.051 105.537,154.051 105.537,155.829 104.013,155.829 103.378,156.464 103.378,161.925 103.886,162.433 104.14,162.687 105.41,162.687 105.537,162.687 108.839,165.989 109.22,166.37 110.109,166.37
MCONTACTOUT on Top Layer "Top Layer-No Net" (solid, remove dead copper, pour order 47): 110.744,123.571 110.109,124.206 108.839,124.206 107.696,125.349 105.41,125.349 105.41,123.571 106.807,123.571 107.823,122.555 107.823,122.174 109.093,120.904
MCONTACTIN on Top Layer "Top Layer-No Net" (solid, remove dead copper, pour order 48): 106.553,121.92 106.553,119.761 107.569,118.745 110.109,118.745 110.109,115.57 105.537,115.57 104.394,116.713 104.394,122.047
GCONTACTIN on Top Layer "Top Layer-No Net" (solid, remove dead copper, pour order 49): 105.41,128.651 106.426,128.651 107.442,127.635 108.966,126.111 109.855,126.111 109.855,128.27 110.49,128.905 109.601,128.905 108.839,129.667 108.458,130.048 107.315,130.048 106.934,130.429 105.41,130.429
GCONTACTOUT on Top Layer "Top Layer-No Net" (solid, remove dead copper, pour order 50): 105.41,131.191 107.315,131.191 107.696,130.81 110.109,130.81 110.363,131.064 110.109,131.318 110.109,133.985 108.331,133.985 107.823,133.477 107.315,132.969 105.41,132.969
DIGITALIN on Top Layer "Top Layer-No Net" (solid, remove dead copper, pour order 51): 109.982,140.97 107.315,140.97 106.934,141.351 104.775,141.351 104.013,142.113 104.013,144.907 104.775,145.669 106.045,145.669 106.299,145.669 107.823,144.145 110.109,144.145
BUZZEROUT on Top Layer "Top Layer-No Net" (solid, remove dead copper, pour order 52): 105.41,146.431 107.442,146.431 107.823,146.05 110.109,146.05 110.109,149.225 109.22,149.225 108.204,148.209 105.41,148.209
PREHEATEROUT on Top Layer "Top Layer-No Net" (solid, remove dead copper, pour order 39): 105.537,148.971 107.442,148.971 108.077,149.606 108.839,150.368 110.236,150.368 111.506,151.638 111.506,152.908 108.585,152.908 108.585,152.019 107.823,151.257 107.315,150.749 105.537,150.749
FLSTARTOUT on Top Layer "Top Layer-No Net" (solid, remove dead copper, pour order 53): 105.41,151.511 106.68,151.511 107.823,152.654 107.95,152.781 107.95,153.416 107.95,153.797 108.966,154.813 109.728,155.575 110.744,155.575 111.506,156.337 111.506,157.988 109.093,157.988 107.188,156.083 107.188,153.797 106.68,153.289 105.41,153.289
DGSTOPOUT on Top Layer "Top Layer-No Net" (solid, remove dead copper, pour order 54): 105.41,156.591 106.299,156.591 106.934,157.226 108.077,158.369 108.077,159.131 109.347,160.401 110.363,160.401 111.506,161.544 111.506,163.068 109.982,163.068 109.093,163.957 108.966,163.957 108.839,163.957 107.442,162.56 107.442,160.401 107.442,160.02 107.188,159.766 107.188,158.877 106.807,158.496 106.68,158.369 106.172,158.369 105.41,158.369
BAT+ on Top Layer "Top Layer-No Net" (solid, remove dead copper, pour order 55): 120.142,107.442 120.142,105.283 119.761,104.902 118.364,104.902 117.348,104.902 116.967,105.283 116.713,105.537 116.713,108.204 116.332,108.585 109.982,108.585 109.982,105.41 113.538,105.41 114.681,104.267 115.951,102.997 118.999,102.997 119.761,102.997 120.523,102.997 121.539,104.013 122.047,104.521 122.047,107.569
BAT+ on Top Layer "Top Layer-No Net" (solid, remove dead copper, pour order 56): 116.713,108.204 116.713,154.686 118.237,156.21 121.031,156.21 121.031,159.385 116.967,159.385 115.824,158.242 115.062,157.48 115.062,149.733 115.062,110.49 114.173,109.601 113.157,108.585 112.141,108.585 112.141,106.553 112.776,105.918 113.157,105.537 116.713,105.537

## Keep-outs
Keep-Out Layer:
  lines w0.254: 98,98 100,98 182,98 182,177 98,177 98,98 ; 187.563,98.784 187.563,146 224.563,146 224.563,98.784 187.563,98.784
  text "KEEPOUT LAYER" at 189,142 h1.78
  text "PCB INFORMATION:" at 188.677,137.404 h1.78
  text "PCB: FR-4" at 188.677,132.276 h1.78
  text "THICKNESS:75MICRONS" at 188.677,127.149 h1.78
  text "=2 OZ" at 188.677,123.149 h1.78
  text "LAYERS TO PRINT:" at 188.7,119.6 h1.78
  text "TOP LAYER CU" at 196.5,115.9 h1.52
  text "TOP LEGEND" at 196.5,112.9 h1.52
  text "TOP SOLDER" at 196.7,110 h1.52
  text "BOTTOM LEGEND" at 196.9,106.9 h1.52
  text "BOTTOM SOLDER" at 196.7,104 h1.52
  text "BOTTOM LAYER CU" at 196.723,101.019 h1.52
  text "MOUNTING HOLE SIZE IS 2MM" at 114,93 h1.78

## Other copper
Top Layer:
  text "TOP LAYER CU" at 187.534,174.298 h1.78
  text "COMPONENT SIDE" at 132.3,101.5 h1.27
Bottom Layer:
  region: 103,170 98,170 98,161 103,161
  region: 182,171 175,171 175,162 182,162
  region: 182,113 175,113 175,104 182,104
  rectangle: 98,104 105,113
  text "A3" at 155.702,171.806 h2.54
  text "rev3.1" at 148.463,171.704 h1.78
  text "BOTTOM LAYER CU" at 187.534,168.799 h1.78
  text "SIMCONS" at 179.12,157.06 h1.78 r90
  text "SOLDER SIDE" at 147.413,101.5 h1.27

## Silkscreen, mask and mechanical layers (free items; w line width, h text height)
Top Overlay:
  drawing of 1574 lines, arcs and shapes, not listed
  text "SIMCONS" at 136.906,160.528 h2.54
  text "CONTROL SYSTEMS" at 127.254,156.464 h2.54
  text "TOP OVERLAY" at 187.3,148.2 h1.78
  text "C" at 144.907,138.811 h6.35
  text "S" at 138.938,137.414 h8.46
  text "S" at 144.78,137.414 h6.35
Bottom Overlay:
  drawing of 1574 lines, arcs and shapes, not listed
  text "BOTTOM LEGEND" at 187.534,163.3 h1.78
  text "A3 rev3.1" at 179,139 h2.03 r90
  text "S/N:" at 156,100 h2.03
Top Solder:
  the board outline again, w0.254
  text "TOP SOLDER" at 187.534,157.801 h1.78
Bottom Solder:
  the board outline again, w0.254
  text "BOTTOM SOLDER" at 187.534,152.302 h1.78